# Altium PCB BlindController.PcbDoc
Units mil, origin at the board's own origin, x right, y up, seen from the top; angles counter-clockwise.
Board outline 6000 x 4000 mil, 2 copper layers (Top Layer, Bottom Layer); 64 components, 46 nets, 203 pads, 0 vias.
Unrouted connection lines stored in the file: 131.
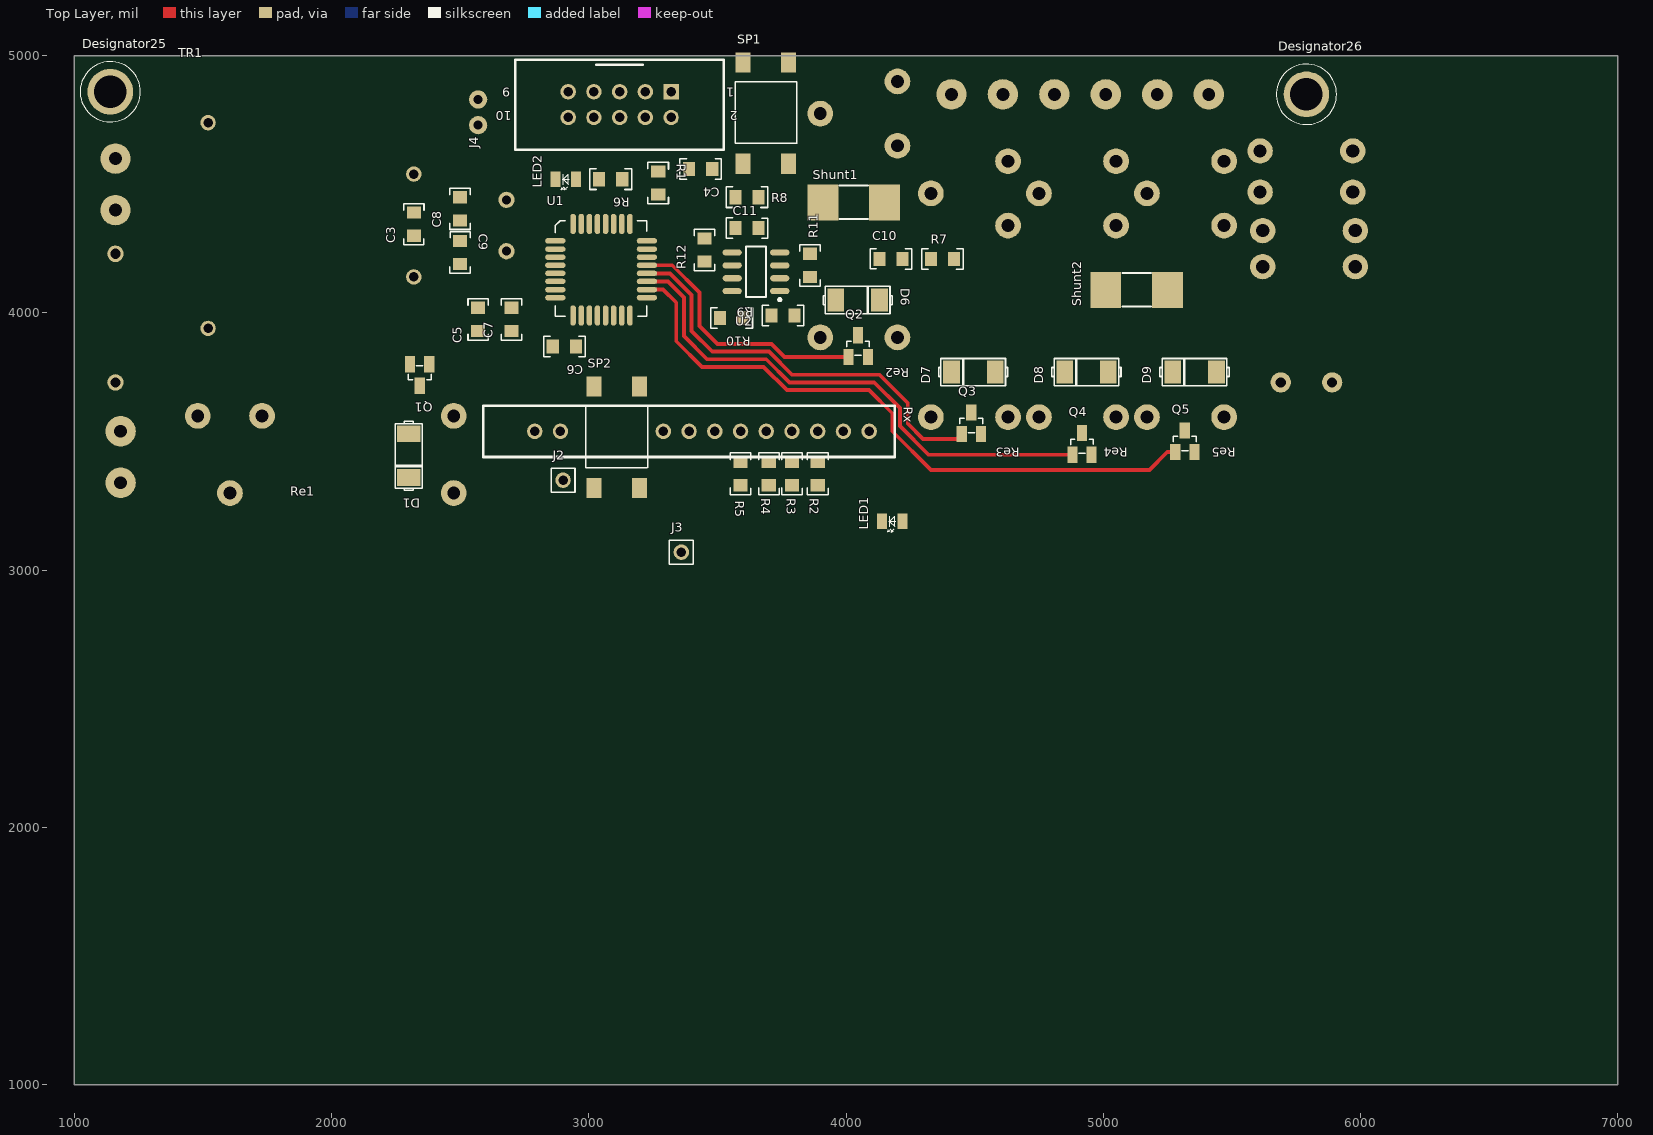
[diagram p0: Top Layer view]
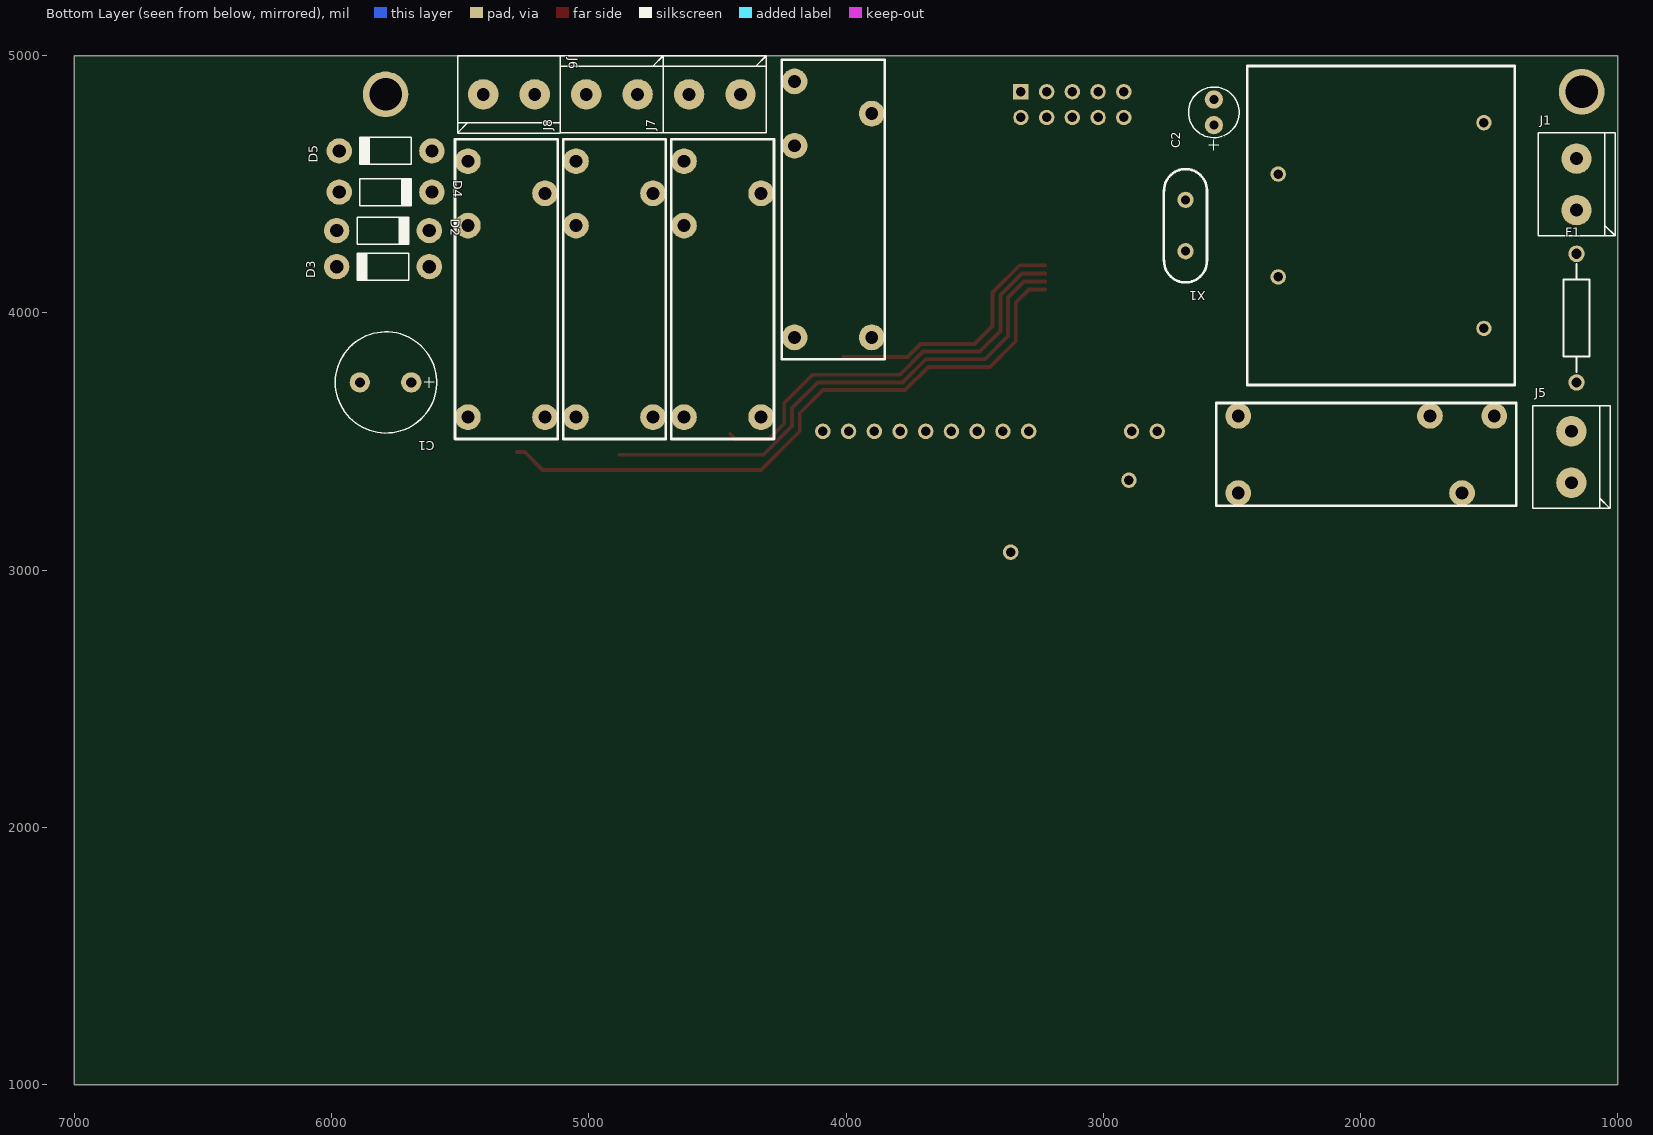
[diagram p1: Bottom Layer view, seen from below]

## Layer stack, top to bottom
Top Layer: signal copper 1.4
Dielectric: dielectric 12.6, FR-4, Dk 4.8
Bottom Layer: signal copper 1.4

## Board outline
1000,1000 7000,1000 7000,5000 1000,5000

## Design rules (kind name [scope] priority, off if disabled: settings)
Clearance [All] p1: gap=7
ComponentClearance [All] p1 off: gap=10 collisioncheckmode=3 verticalgap=10 showdistances=FALSE
PolygonConnect [All] p1: connectstyle=Relief reliefconductorwidth=10 reliefentries=4 polygonreliefangle="90 Angle"
RoutingVias [All] p1: holewidth=28 width=50 viastyle="Through Hole" minholewidth=28 minwidth=50 maxholewidth=28 maxwidth=50
SilkscreenOverComponentPads [All] p1: minsilkscreentomaskgap=10
SolderMaskExpansion [All] p1: expansion=4
Width [All] p1: maxlimit=40 minlimit=10 preferedwidth=15 minimp=50.000000 maximp=50.000000 favimp=50.000000
26 further rules are at their usual default settings.

## Components (designator, comment, footprint, x,y, rotation, side; value= is the part's Value field where it differs from the comment)
C1 "2.2mF/35 V" EL_10X13 5690,3730 r0 bottom
C2 "C_EL" EL_5x11 2570,4730 r90 bottom
C3 "C" C0805 2320,4300 r90 top
C4 "" C0805 3480,4560 r180 top
C5 "C" C0805 2570,3930 r90 top
C6 "C" C0805 2950,3870 r180 top
C7 "C" C0805 2700,3930 r90 top
C8 "C" C0805 2500,4360 r90 top
C9 "C" C0805 2500,4280 r270 top
C10 "C" C0805 4130,4210 r0 top
C11 "C" C0805 3660,4330 r180 top
D1 "D" SMA 2300,3480 r270 top
D2 "D" DO41 5980,4320 r180 bottom
D3 "D" DO41 5620,4180 r0 bottom
D4 "D" DO41 5970,4470 r180 bottom
D5 "D" DO41 5610,4630 r0 bottom
D6 "D" SMA 4010,4050 r0 top
D7 "D" SMA 4530,3770 r180 top
D8 "D" SMA 4970,3770 r180 top
D9 "D" SMA 5390,3770 r180 top
Designator25 "Comment" Sloupek 1140,4860 r0 top
Designator26 "Comment" Sloupek 5790,4850 r0 top
F1 "Fuse" AXIAL-0.5L 1160,3980 r90 bottom
J1 "230V AC" ARK_2 1160,4400 r90 bottom
J2 "Antenna" PIN 2900,3350 r0 top
J3 "TP1" PIN 3360,3070 r0 top
J4 "ICC/SWIM (MLW10)" MLW10 3320,4860 r180 top
J5 "230V AC to Trans Primary" ARK_2 1180,3340 r90 bottom
J6 "24V AC Trans Sec." ARK_2 5410,4850 r180 bottom
J7 "Mot1 24V DC" ARK_2 4410,4850 r0 bottom
J8 "Mot2 24V DC" ARK_2 4810,4850 r0 bottom
LED1 "LED" LED_SMD 4220,3190 r180 top
LED2 "LED" LED_SMD 2950,4520 r180 top
Q1 "BSS138" SOT23 2380,3800 r180 top
Q2 "BSS138" SOT23 4010,3830 r0 top
Q3 "BSS138" SOT23 4450,3530 r0 top
Q4 "BSS138" SOT23 4880,3450 r0 top
Q5 "BSS138" SOT23 5280,3460 r0 top
R1 "" R0805 3270,4550 r270 top
R2 "R" R0805 3890,3330 r90 top
R3 "R" R0805 3790,3330 r90 top
R4 "R" R0805 3700,3330 r90 top
R5 "R" R0805 3590,3330 r90 top
R6 "R" R0805 3130,4520 r180 top
R7 "R" R0805 4420,4210 r180 top
R8 "R" R0805 3660,4450 r180 top
R9 "R" R0805 3710,3990 r0 top
R10 "R" R0805 3600,3980 r180 top
R11 "R" R0805 3860,4140 r90 top
R12 "R" R0805 3450,4200 r90 top
Re1 "SPDT" RELE_JS-K 1480,3600 r0 top
Re2 "SPDT" RELE_JS-K 4200,4900 r270 top
Re3 "SPDT" RELE_JS-K 4630,4590 r270 top
Re4 "SPDT" RELE_JS-K 5050,4590 r270 top
Re5 "SPDT" RELE_JS-K 5470,4590 r270 top
Rx "MX-4MHCS" RX-4MHCS 2790,3540 r0 top
Shunt1 "1R0" "R Shunt S-2" 4030,4430 r180 top
Shunt2 "1R0" "R Shunt S-2" 5130,4090 r180 top
SP1 "SP" DIP_PUSH_BUTTON 3600,4580 r90 top
SP2 "SP" DIP_PUSH_BUTTON 3020,3320 r90 top
TR1 "MYRRA 47152" MYRRA47000 1520,3940 r90 top
U1 "STM8AF61x6T" QFP32 2870,4280 r0 top
U2 "TS922" SO8_L 3650,4160 r180 top
X1 "" HC-49U 2680,4440 r270 bottom

## Footprints (in the part's own frame and the unit in brackets; to place one, negate y for a bottom-side part, rotate by r counter-clockwise, add the part's x,y. Pads: shape width x height; smd on the part's side, far side on the other; paste and mask are expansions set on the pad)
ARK_2 [mm]
  round 3 hole 1.27: 1(0,0) 2(5.08,0)
  silkscreen extent -2.54,-3.82 7.62,3.8
AXIAL-0.5L [mil] "Semiconductor Resistor; 2 Leads"
  round 64 hole 40: 1(-250,0) 2(250,0)
  silkscreen extent -210,-50 210,50
C0805 [mm]
  rect 1.2x1.4 smd: 1(0,0) 2(2.286,0)
  silkscreen extent -0.9,-1 3.19,1
DIP_PUSH_BUTTON [mm]
  rect 2x1.5 smd: 1(0,0) 2(0,-4.496) 3(10.008,-4.496) 4(10.008,0)
  silkscreen extent 2.01,-5.31 8.1,0.79
DO41 [mm]
  round 2.5 hole 1.3: 1(0,0) 2(9.144,0)
  silkscreen extent 2.03,-1.33 7.11,1.33
EL_5x11 [mm]
  round 1.8 hole 0.9: 1(0,0) 2(2.54,0)
  silkscreen extent -2.48,-2.5 3.77,2.5
EL_10X13 [mm]
  round 2 hole 1: 1(0,0) 2(5.08,0)
  silkscreen extent -2.5,-5 7.5,5
HC-49U [mil]
  round 63 hole 35: 1(0,0) 2(200,0)
  silkscreen extent -119,-84 321,83
LED_SMD [mm]
  rect 1x1.5 smd: 1(0,0) 2(2.032,0)
  silkscreen extent 0.66,-0.51 1.45,1.05
MLW10 [mil] "Header, STRT 10WAY - MLW10"
  rect 60x60 hole 37: 1(0,0)
  round 60 hole 37: 2(0,100) 3(100,0) 4(100,100) 5(200,0) 6(200,100) 7(300,0) 8(300,100) 9(400,0) 10(400,100)
  silkscreen extent -205,-125 605,225
MYRRA47000 [mil] "AC/DC converter Myrra 47000 series"
  round 60 hole 37: 1(0,0) 5(800,0) 7(600,-800) 9(200,-800)
PIN [mil]
  round 60 hole 37: 1(0,0)
  silkscreen extent -46,-46 46,46
QFP32 [mm]
  oval 2x0.55 smd: 1(0,0) 2(0,-0.8) 3(0,-1.6) 4(0,-2.4) 5(0,-3.2) 6(0,-4) 7(0,-4.8) 8(0,-5.6) 17(9.04,-5.6) 18(9.04,-4.8) 19(9.04,-4) 20(9.04,-3.2) 21(9.04,-2.4) 22(9.04,-1.6) 23(9.04,-0.8) 24(9.04,0)
  oval 0.55x2 smd: 9(1.76,-7.36) 10(2.56,-7.36) 11(3.36,-7.36) 12(4.16,-7.36) 13(4.96,-7.36) 14(5.76,-7.36) 15(6.56,-7.36) 16(7.36,-7.36) 25(7.36,1.68) 26(6.56,1.68) 27(5.76,1.68) 28(4.96,1.68) 29(4.16,1.68) 30(3.36,1.68) 31(2.56,1.68) 32(1.76,1.68)
  silkscreen extent 0,-7.44 9.04,2
R0805 [mm]
  rect 1.2x1.4 smd: 1(0,0) 2(2.286,0)
  silkscreen extent -0.93,-1.03 3.2,1.02
"R Shunt S-2" [mil] "Shunt Resistor; Body 6.3 x 3.2 mm (LxW typ)"
  rect 120x140 smd: 1(-120,0) 2(120,0)
  silkscreen extent -55,-65 55,65
RELE_JS-K [mil] "Rele - K contacts configuration"
  round 100 hole 50: 1(0,0) 2(250,0) 3(995,0) 4(995,-300) 5(125,-300)
RX-4MHCS [mil] "433MHz 4 channels receiver"
  round 60 hole 37: 2(0,0) 3(100,0) 7(500,0) 8(600,0) 9(700,0) 10(800,0) 11(900,0) 12(1000,0) 13(1100,0) 14(1200,0) 15(1300,0)
  silkscreen extent -200,-100 1400,100
Sloupek [mm]
  round 4.5 hole 3.2: 1(0,0)
  silkscreen extent -2.98,-2.98 2.98,2.98
SMA [mil]
  rect 65x90 smd: 1(-50,0) 2(120,0)
  silkscreen extent -99,-53 170,53
SO8_L [mm] "SOIC, 8-Leads, Body 4.9x3.9mm, Pitch 1.27mm, IPC High Density"
  oval 1.9x0.6 smd: 1(-2.35,1.905) 2(-2.35,0.635) 3(-2.35,-0.635) 4(-2.35,-1.905) 5(2.35,-1.905) 6(2.35,-0.635) 7(2.35,0.635) 8(2.35,1.905)
  silkscreen extent -2.48,-2.5 1,2.88, body extent -1.95,-2.45 1.95,2.45, height 1.75
SOT23 [mm]
  rect 1x1.6 smd: 1(0,-0.025) 2(1.905,-0.025) 3(0.94,2.108)
  silkscreen extent -0.18,0.13 2.06,1.52

## Part data
C1: library part C_EL_1
C4: library part C
J1 J5 J6 J7 J8: library part CON_2
J2 J3: library part PIN
J4: library part CON_10
Q1 Q2 Q3 Q4 Q5: "N-Channel Enhancement Mode Vertical DMOS FET"
R1 Shunt1 Shunt2: library part R
Re1 Re2 Re3 Re4 Re5: library part Rele_SPDT, "rele SPDT"
Rx: library part RX-4MHCS
TR1: library part MYRRA_AC_DC, "AC/DC  IN:85..260 V AC(DC), OUT: 5V/900mA DC"
U2: library part TS912ID, "Rail-to-Rail CMOS Dual Operational Amplifier"
X1: library part XTALL

## Nets (pads, with @x,y where several pads share a name; then routed paths per layer and width w, separated by ;. In a path a pad name is that pad's centre, name@x,y a point inside that pad or via, vN(x,y) a via of type N, cw(c..) or ccw(c..) an arc to the next point about the centre after c; other vN are vias at no path point)
5V: C2.1 C3.2 C6.2 C7.2 D1.2 D6.2 D7.2 D8.2 D9.2 J4.7 R1.1 R2.1 R3.1 R4.1 R5.1 R6.1 Re1.4 Re2.3 Re3.3 Re4.3 Re5.3 Rx.15 TR1.7 U1.6 U1.7 U1.9 U2.8
C_SENSE1: R9.1 U1.16 U2.1
C_SENSE2: R10.1 U1.15 U2.7
CH1: R5.2 Rx.10 U1.11
CH2: R4.2 Rx.11 U1.12
CH3: R3.2 Rx.12 U1.13
CH4: R2.2 Rx.13 U1.14
GND: C1.2 C2.2 C3.1 C4.1 C5.1 C6.1 C7.1 C8.1 C9.1 C10.1 C11.1 D2.1 D4.1 J4.3 J4.10 LED1.2 Q1.2 Q2.2 Q3.2 Q4.2 Q5.2 R11.2 R12.2 Rx.2 Rx.7 Shunt1.1 Shunt2.1 SP1.1 SP2.1 TR1.9 U1.4 U1.10 U2.4
NetC1_1: C1.1 D3.2 D5.2 Re2.1 Re3.1 Re4.1 Re5.1
NetC5_2: C5.2 U1.5
NetC8_2: C8.2 U1.2 X1.1
NetC9_2: C9.2 U1.3 X1.2
NetC10_2: C10.2 R7.2 U2.3
NetC11_2: C11.2 R8.2 U2.5
NetD1_1: D1.1 Q1.3 Re1.3
NetD2_2: D2.2 D3.1 J6.1
NetD4_2: D4.2 D5.1 J6.2
NetD6_1: D6.1 Q2.3 Re2.4
NetD7_1: D7.1 Q3.3 Re3.4
NetD8_1: D8.1 Q4.3 Re4.4
NetD9_1: D9.1 Q5.3 Re5.4
NetF1_1: F1.1 Re1.1 TR1.1
NetF1_2: F1.2 J1.1
NetJ1_2: J1.2 J5.2 TR1.5
NetJ2_1: J2.1 Rx.3
NetJ3_1: J3.1 Rx.8
NetJ5_1: J5.1 Re1.5
NetJ7_1: J7.1 Re2.5
NetJ7_2: J7.2 Re3.5
NetJ8_1: J8.1 Re4.5
NetJ8_2: J8.2 Re5.5
NetLED1_1: LED1.1 Rx.14
NetLED2_1: LED2.1 R6.2
NetLED2_2: LED2.2 U1.29
NetQ1_1: Q1.1 U1.17
NetR9_2: R9.2 R11.1 U2.2
NetR10_2: R10.2 R12.1 U2.6
NetRx_9: Rx.9 SP2.2
REL2_CTRL: Q2.1 U1.21 | length 1007.9
  Top Layer w15: U1.21 3324.49,4185.51 3430,4080 3430,3950 3500,3880 3710,3880 3761,3829 Q2.1
REL3_CTRL: Q3.1 U1.20 | length 1627.6
  Top Layer w15: U1.20 3315.98,4154.02 3400,4070 3400,3930 3480,3850 3700,3850 3790,3760 4130,3760 4240,3650 4240,3570 4300,3510 4431,3510 Q3.1
REL4_CTRL: Q4.1 U1.19 | length 2061.9
  Top Layer w15: U1.19 3307.48,4122.52 3370,4060 3370,3910 3460,3820 3690,3820 3780,3730 4110,3730 4210,3630 4210,3560 4321,3449 Q4.1
REL5_CTRL: Q5.1 U1.18 | length 2501.9
  Top Layer w15: U1.18 3288.98,4091.02 3340,4040 3340,3890 3440,3790 3680,3790 3770,3700 4090,3700 4180,3610 4180,3540 4330,3390 5180,3390 5249,3459 Q5.1
RST: C4.2 J4.6 R1.2 SP1.2 U1.1
S1: R8.1 Re2.2 Re3.2 Shunt1.2
S2: R7.1 Re4.2 Re5.2 Shunt2.2
SWIM: J4.2 U1.26
pads on no net: Designator25.1 Designator26.1 J4.1 J4.4 J4.5 J4.8 J4.9 Re1.2 SP1.3 SP1.4 SP2.3 SP2.4 U1.8 U1.22 U1.23 U1.24 U1.25 U1.27 U1.28 U1.30 U1.31 U1.32

## Text inside footprints (layer, text, board x,y; h text height)
J4: Top Overlay "1" at 3565,4875 h35 r180; Top Overlay "2" at 3580,4785 h35 r180; Top Overlay "9" at 2695,4875 h35 r180; Top Overlay "10" at 2700,4785 h35 r180